# Altium PCB NZS_A4954_Rx.PcbDoc (part 2 of 2)
Units mil, origin at the board's own origin, x right, y up, seen from the top; angles counter-clockwise.
Board outline 1653.54 x 1653.54 mil, 2 copper layers (Top Layer, Bottom Layer), stack 61.2 mil thick; 79 components, 75 nets, 289 pads, 145 vias.
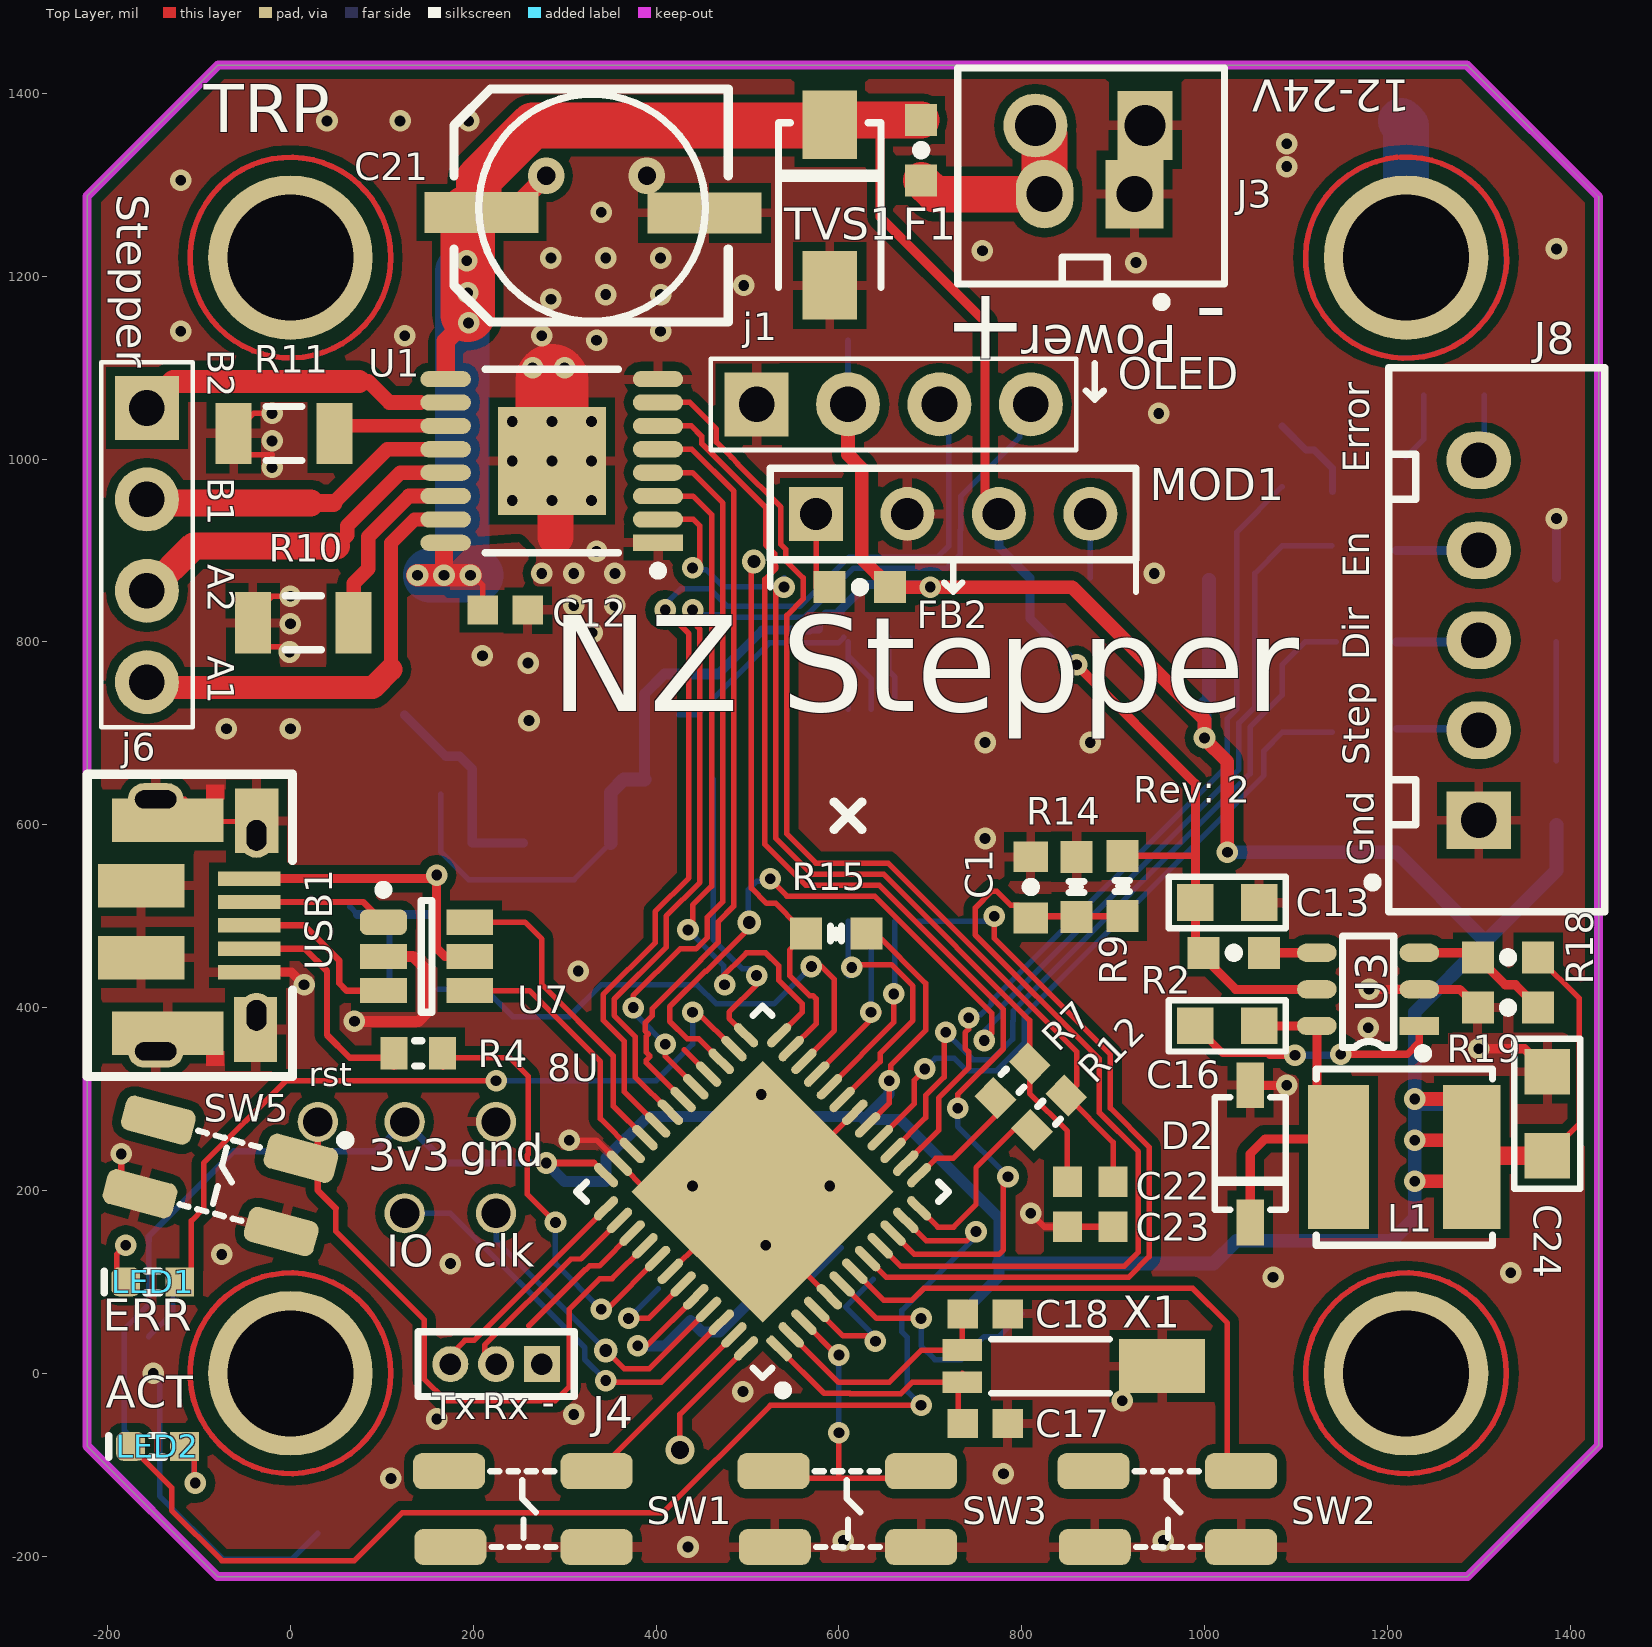
[diagram p0: Top Layer view]

## Via types
v1: diameter 23.62, hole 11.81, Top Layer to Bottom Layer, tented both sides, 130 vias
v2: diameter 24, hole 12, Top Layer to Bottom Layer, tented both sides, 9 vias
v3: diameter 26, hole 14, Top Layer to Bottom Layer, tented both sides, 3 vias
v4: diameter 40, hole 20, Top Layer to Bottom Layer, tented both sides, 2 vias
v5: diameter 32, hole 20, Top Layer to Bottom Layer, 1 vias

## Nets (pads, with @x,y where several pads share a name; then routed paths per layer and width w, separated by ;. In a path a pad name is that pad's centre, name@x,y a point inside that pad or via, vN(x,y) a via of type N, cw(c..) or ccw(c..) an arc to the next point about the centre after c; other vN are vias at no path point) (continued)
Netj6_1: (continued)
  Top Layer w25: j6.1 -128,1085 75,1085
Netj6_2: j6.2 U1.12 | length 351.2
  Top Layer w16: 47,952 105.8,1010.8 U1.12
  Top Layer w20: 22,952 47,952
  Top Layer w30: j6.2@-157,952 22,952
Netj6_3: j6.3 U1.13 | length 384.2
  Top Layer w16: 50,905 62,917 62,927 120.21,985.21 U1.13
  Top Layer w30: j6.3@-155,856 -106,905 50,905
Netj6_4: j6.4 U1.15 | length 478
  Top Layer w15: 110,770 110,908.18 135.84,934.02 U1.15
  Top Layer w25: j6.4@-151,750 90,750 110,770
NetLED1_K: LED1.K R13.1 | length 95.9
  Top Layer w6: LED1.K -190,110 -190,130 v1(-180,140)
  Bottom Layer w6: R13.1 -190,108.43 -190,130 v1(-180,140)
NetLED2_A: LED2.A R8.1 | length 69.4
  Top Layer w6: v1@-105,-119 LED2.A@-105,-88.06
  Bottom Layer w6: v1@-106,-120 R8.1@-106,-81.57
  other v1: -104,-120
NetMOD1_4: MOD1.4 R20.1 | length 70
  Bottom Layer w6: R20.1 MOD1.4
NetQ5_1: Q5.1 R21.2 | length 99.1
  Bottom Layer w8: R21.2 1111,1010 1120,1010 1140,990 Q5.1
NetQ5_3: Q5.3 R3.1 | length 76.3
  Bottom Layer w6: Q5.3 1240,1022 R3.1
NetR2_1: R2.1 U3.4 | length 57.9
  Top Layer w10: R2.1 U3.4
NetR4_2: R4.2 USB1.4 | length 253
  Top Layer w7: USB1.4 15.59,464.41 40,440 40,370 65,345 103.42,345 R4.2@113.43,335
NetR5_2: R5.2 R6.1 U8.22 | length 594.4
  Top Layer w6: U8.22 561.8,341.8 595,375 595,431 581,445 575,445 v1@572.44,447.56
  Bottom Layer w6: R6.1 R5.2 ; R5.2@213.82,420 R5.2 ; v1(570,445) 529,404 466,404 445,425 340,425 305,390 243.43,390 R5.2
NetR10_1: R10.1 U1.14 | length 203.9
  Top Layer w16: R10.1 69.12,864.12 85,880 85,915 129.62,959.62 U1.14
NetR11_1: R11.1 U1.11 | length 120.4
  Top Layer w6: R11.1@53.12,1018 R11.1@53.12,1018.56
  Top Layer w15: R11.1@50,1036.39 U1.11
NetR18_2: R18.2 R19.1 U3.3 | length 154.9
  Top Layer w10: U3.3 1294,460 R18.2 1329,425 1340,425 R19.1
NetU7_4: U7.4 U8.34 | length 286.6
  Top Layer w6: U7.4 261.4,418.6 339,341 339,278.68 U8.34
NetU7_6: U7.6 U8.33 | length 350.4
  Top Layer w6: U7.6 256.6,493.4 275,475 275,425.52 353.19,347.34 353.19,292.33 U8.33
RXD: J4.2 U8.38 | length 217.1
  Top Layer w6: J4.2@212.56,17.56 212.56,30.7 306.86,125 317.73,125 U8.38
RXLED: U8.48 | length 141.2
  Top Layer w6: v5(426.11,-83.89) 426.11,-45 U8.48
SCK: U6.2 U8.20 | length 210.1
  Top Layer w6: U8.20 660,383.76 660,398.94 v1(660,415)
  Bottom Layer w6: v1@661.18,415 U6.2
SCL: j1.3 U8.32 | length 1157.7
  Top Layer w6: U8.32 365.19,308.17 365.19,363.41 342.19,386.41 342.19,414.13 399,470.94 399,504.94 436,541.94 436,809 v1(410,835)
  Bottom Layer w6: v1(410,835) 407,838 427,858 459,858 478,839 557.42,839 611.23,892.81 708.1,892.81 720,904.71 720,1035 710,1045 j1.3
SDA: j1.4 U8.31 | length 1143.2
  Top Layer w6: U8.31 377.19,324.01 377.19,368.38 354.19,391.38 354.19,409.16 411,465.97 411,499.97 448,536.97 448,813.97 445,816.97 v1@445,840
  Bottom Layer w6: v1@440,840 450,830 470.03,830 473.03,827 562.39,827 563.39,828 564,828 565.66,829.66 565.66,830.27 616.2,880.81 717.81,880.81 733,896 733,922.33 733.47,922.8 733.47,959.47 797.75,1023.75 797.75,1047.75 j1.4
  other v1: 440,835
STEP: J8.2 R22.1 | length 88.4
  Bottom Layer w8: R22.1 J8.2@1298.43,705
SWCLK: pad.0@225,175 U8.45 | length 347.2
  Top Layer w6: v3(345,25) 365,5 392.6,5 U8.45
  Bottom Layer w6: pad.0@225,175 225,145 v3(345,25)
SWDIO: pad.0@125,175 U8.46 | length 447
  Top Layer w6: v1@350,-10 405.44,-10 U8.46
  Bottom Layer w6: pad.0@130,175 175,175 322,28 322,15.07 v1(345,-7.97)
TXD: J4.3 U8.37 | length 246.8
  Top Layer w6: J4.3 175,20 191,36 200.89,36 U8.37
TXLED: U8.39 | length 154.9
  Top Layer w6: 261,52 322,113 322.7,113 327.26,117.56 338.12,117.56 U8.39
USBHOSTEN: R4.1 U8.41 | length 479.5
  Top Layer w6: R4.1@166.57,335 176.57,345 240,345 260,325 260,239.7 259,238.7 259,196 v1(290,165) ; v1(340,70) 346.24,70 U8.41
  Bottom Layer w6: v1(290,165) 290,120 v1(340,70)
VMOT: C12.1 C13.1 C21.1 F1.2 MOD1.3 R2.2 R9.2 R20.2 TVS1.K U1.9 U1.16 U3.5 | length 2594.1
  Top Layer w6: C21.1@168.56,1270 C21.1@192.56,1270 ; C21.1@191,1273 192.56,1273 192.56,1271.44 C21.1@192.56,1270 ; v1(197,873) 199.56,873 210.39,862.17 C12.1 ; C21.1 194,1270 C21.1@192.56,1270
  Top Layer w7: R9.2 987.67,566 990,568.33
  Top Layer w10: 645,1371 645,1265 760,1150 760,955 MOD1.3 ; v1(860,775) 990,645 990,568.33 C13.1 R2.2@990,469 ; R2.2@999,455 1034,420 U3.5
  Top Layer w20: v1(168,873) 168,899.58 ; 169.86,1096.43 169.86,1128.86 v1@190,1149 ; C21.1@240,1270 v4(280,1310)
  Top Layer w25: v1(139,873) v1(168,873) v1(197,873)
  Top Layer w40: TVS1.K@595,1371 645,1371 F1.2
  Top Layer w50: C21.1@191,1273 192.56,1271.44 C21.1@194,1270 ; C21.1@206,1273 206,1306 265,1365 TVS1.K@590,1365 ; TVS1.K TVS1.K@595,1371
  Top Layer w60: v1@194,1158 v1(194,1182) C21.1@194,1270
  Bottom Layer w10: MOD1.3 775,904 R20.2 809,826 v1(860,775)
  Bottom Layer w60: 153,873 v1(168,873) v1(197,873) v1@203,873 ; v1@188,877 188,1205
  other v1: 195,1149 193,1217
VUSB: C2.1 R6.2 U2.3 U7.5 USB1.1 | length 545.3
  Top Layer w10: USB1.1 v1@159.65,541.18 ; v1@160,541.18 v1@159.65,541.18 ; v1(160,545) 159.65,544.65 v1@159.65,541.18 ; U7.5 169,456 159.65,465.35 v1@159.65,541.18
  Bottom Layer w6: C2.1 C2.1@73.4,502
  Bottom Layer w7: R6.2 108.43,498.57
  Bottom Layer w10: C2.1@73.4,502 160,502 v1(160,545)
pads on no net: D1.2 D4.2 U6.6 U6.7 U6.8 U6.9 U6.10 U6.14
copper on no net: | length 5425.7
  Top Layer w6: 1210.46,1330.02 ccw(c1220.47,1220.47) 1214.72,1330.32 ; 109.77,0 ccw(c0,0) 109.77,0 ; 109.77,1220.47 ccw(c0,1220.47) 109.77,1220.47 ; 1330.25,0 ccw(c1220.47,0) 1330.25,0
  Bottom Layer w6: 1175.25,1320.5 ccw(c1220.47,1220.47) 1261.99,1322.09 ; 109.77,0 ccw(c0,0) 109.77,0 ; 109.77,1220.47 ccw(c0,1220.47) 109.77,1220.47 ; 1330.25,0 ccw(c1220.47,0) 1330.25,0

## Polygon pours and split planes (outlines as drawn)
GND on Bottom Layer "GND_bot" (solid, remove dead copper, pour order 8): -216,606 419,606 420,607 420,873 1439,873 1492,926 1494,928 1494,1469 -222,1469 -234,1457 -264,1427 -264,606
GND on Bottom Layer "Bottom Layer-No Net" (solid, remove dead copper, pour order 10): -222.44,1434 -220.44,1432 1434,1432 1434,-206.44 1418,-222.44 1414.44,-226 -221,-226
GND on Top Layer "k" (solid, remove dead copper, pour order 6): -250,1445 1440,1445 1440,-145 1335,-250 -250,-250
VMOT on Top Layer "vmot" (solid, remove dead copper, pour order 4): 195,905 175,885 175,857 173,855 175,857 260,857 260,899 255,904 250,909 249,909

## Keep-outs
Keep-Out Layer:
  lines w10: -222.44,-79.56 -79.56,-222.44 1287.56,-222.44 1431.1,-78.9 1431.1,1252.2 1431.1,1286.9 1286.9,1431.1 -78.9,1431.1 -222.44,1287.56 -222.44,-79.56

## Other copper
Top Layer:
  pour cut-out: 620,1105 620,1010 615,1005 608,1012 537.53,1012 537.53,1102.47 535,1105
Bottom Layer:
  pour cut-out: 520,1105 520,1015 613.56,1015 613.56,1101.44 610,1105

## Silkscreen, mask and mechanical layers (free items; w line width, h text height)
Top Overlay:
  circle w10: c60,255 r5
  lines w7: 525,860 525,890 ; 715,865 725,855 ; 725,890 725,855 ; 735,865 725,855 ; 870,1075 880,1065 ; 880,1105 880,1065 ; 890,1075 880,1065 ; 925,855 925,890
  lines w10: 595,595 625,625 ; 595,625 625,595
  text "12-24V" at 1225,1415 h35 r180
  text "TRP" at -95,1340 h90
  text "Stepper" at -190,1290 h35 r270
  text "Power" at 970,1160 h70 r180
  text "-" at 990,1135 h70
  text "B2" at -100,1120 h50 r270
  text "+" at 715,1110 h80
  text "OLED" at 905,1065 h60
  text "Error" at 1190,985 h50 r90
  text "B1" at -100,980 h50 r270
  text "A2" at -100,885 h50 r270
  text "En" at 1190,870 h50 r90
  text "A1" at -100,785 h50 r270
  text "Dir" at 1190,780 h50 r90
  text "NZ Stepper" at 285,690 h180
  text "Step" at 1190,665 h50 r90
  text "Rev: 2" at 922,614 h50
  text "Gnd" at 1195,555 h50 r90
  text "rst" at 20,305 h45
  text "gnd" at 185,215 h60
  text "3v3" at 85,210 h60
  text "IO" at 105,105 h60
  text "clk" at 200,105 h60
  text "ERR" at -205,35 h60
  text "ACT" at -202,-49 h60
  text "-" at 275,-55 h50
  text "Tx" at 155,-60 h50
  text "Rx" at 210,-60 h50
Bottom Overlay:
  lines w7: -210,610 -180,610 ; 610,-210 610,-130 ; 610,1340 610,1420 ; 1410,610 1420,610
  text "R" at -110,1045 h50 r270
  text "G" at -110,940 h50 r270
  text "Y" at -110,840 h50 r270
  text "B" at -110,745 h50 r270
  text "AS5047D" at 700,635 h30
  text "Original design:" at 1200,440 h60
  text "Misfit Tech +" at 1160,375 h60
  text "Tropical labs" at 1160,320 h60
  text "thmjpr" at 995,200 h60
  text "Github:" at 1195,200 h60
  text "Oct, 2019" at 1275,-185 h60
Bottom Solder:
  rectangle: 220,905 350,1155
Mechanical 15:
  circle w10: c0,1220.47 r118.11
  circle w10: c1220.47,1220.47 r118.11
  circle w10: c1220.47,0 r118.11
  circle w10: c0,0 r118.11
  lines w7: -385,610.24 1870,610.24 ; 610.24,-375 610.24,1525

## Dimensions
-222.44,-79.56 to -79.56,-222.44 on Mechanical 15
1287.56,-222.44 to 1431.1,-78.9 on Mechanical 15
-222.44,1287.56 to -78.9,1431.1 on Mechanical 15
-222.44,1287.56 to 1431.1,1286.9 on Mechanical 15